# Altium PCB FC2.PcbDoc (part 2 of 2)
Units mm, origin at the board's own origin, x right, y up, seen from the top; angles counter-clockwise.
Board outline 53 x 51 mm, 4 copper layers (Top Layer, GND, PWR, Bottom Layer), stack 0.603 mm thick; 103 components, 69 nets, 505 pads, 103 vias.
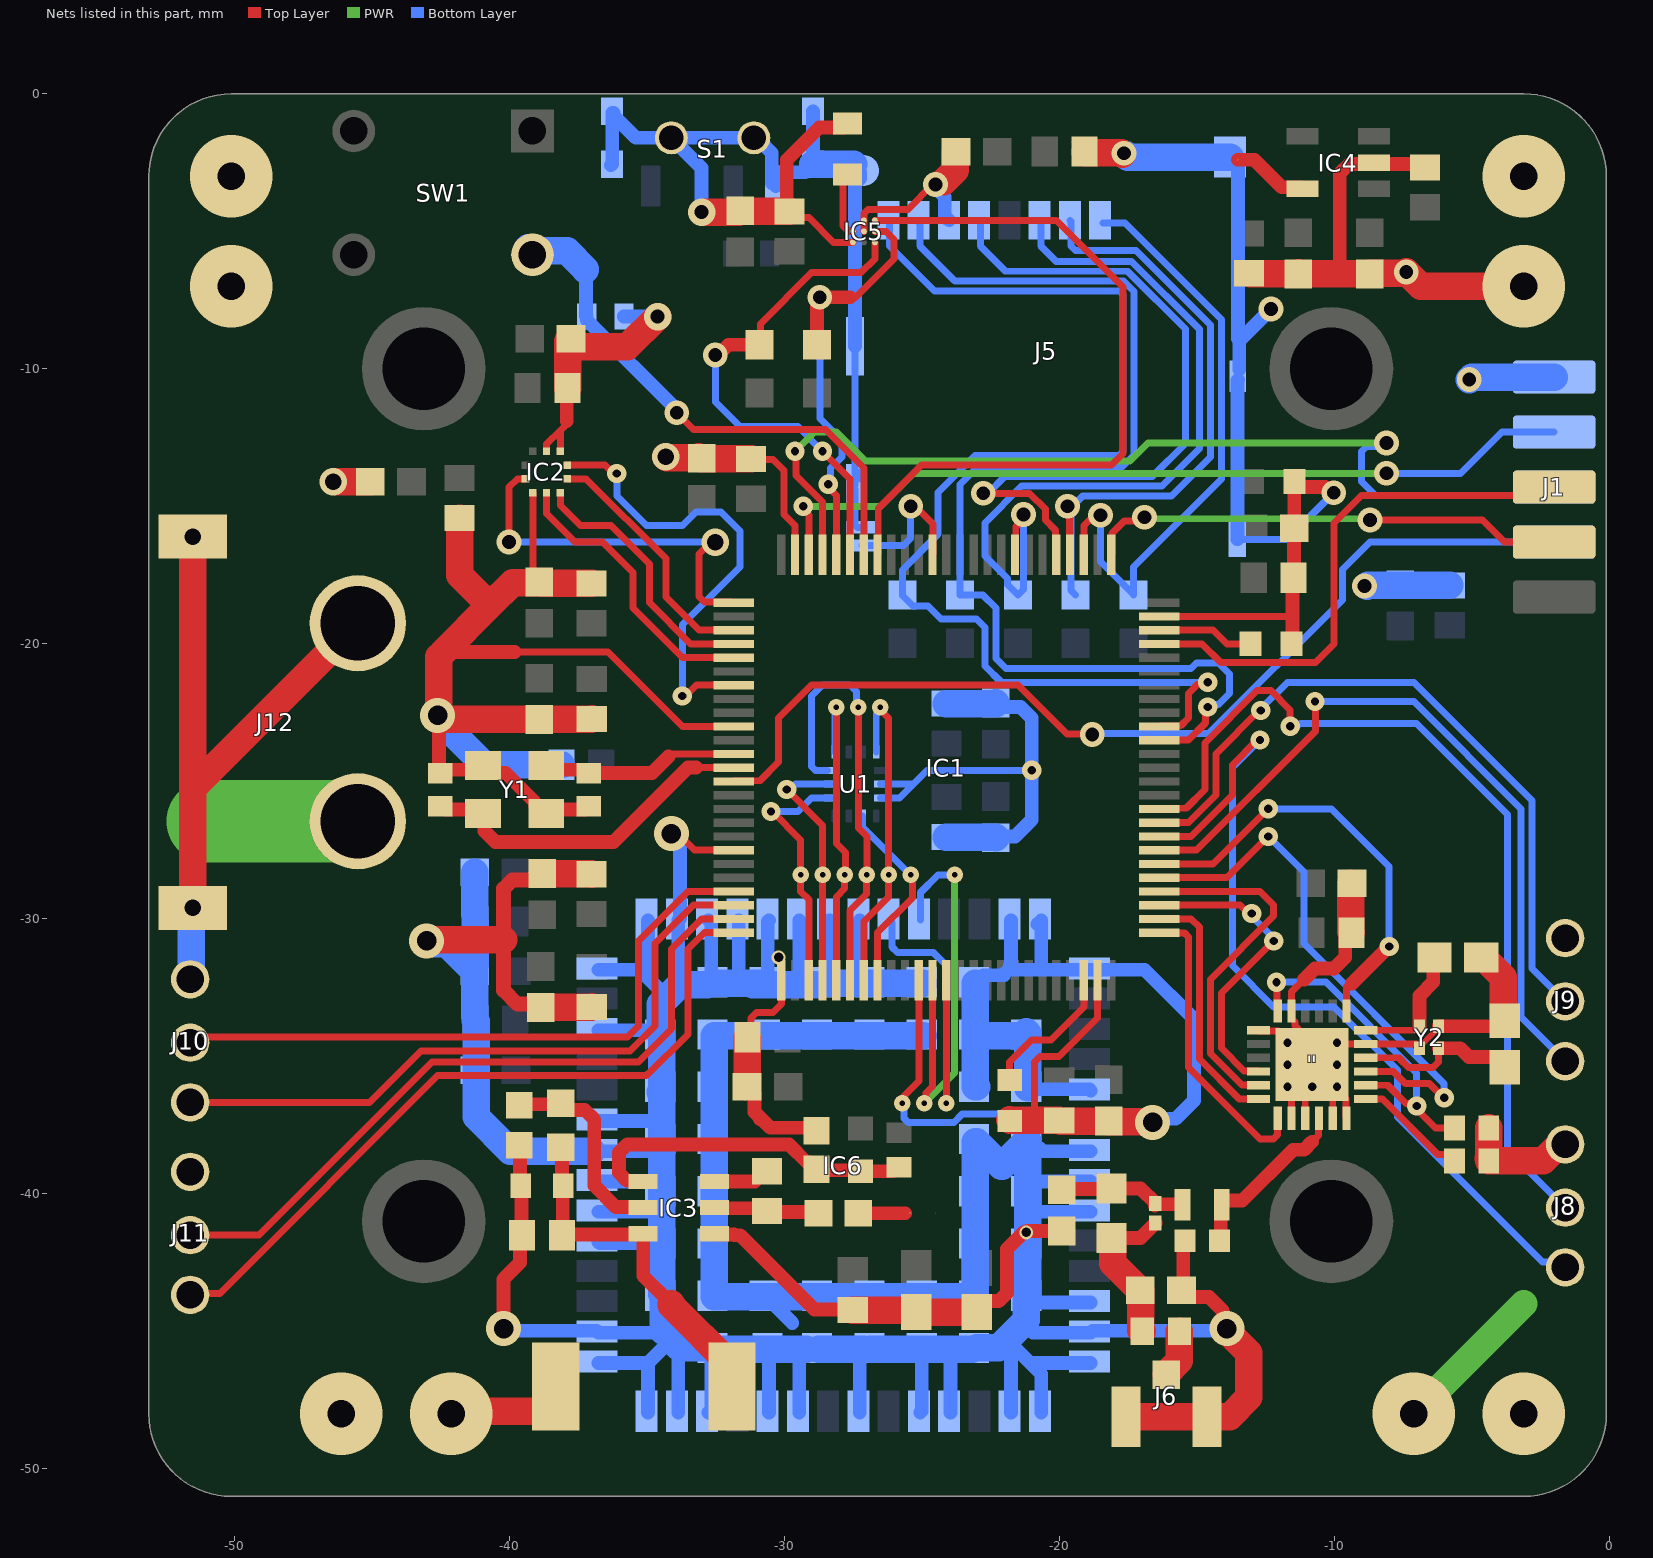
[diagram p4: the nets of this part, all layers, seen from the top]

## Via types
v1: diameter 0.7, hole 0.3, Top Layer to Bottom Layer, 34 vias
v2: diameter 0.9, hole 0.5, Top Layer to Bottom Layer, 26 vias
v3: diameter 0.6, hole 0.2, Top Layer to Bottom Layer, 13 vias
v4: diameter 1.27, hole 0.711, Top Layer to Bottom Layer, 9 vias
v5: diameter 1, hole 0.6, Top Layer to Bottom Layer, 9 vias
v6: diameter 3, hole 1, Top Layer to Bottom Layer, 8 vias
v7: diameter 0.5, hole 0.35, Top Layer to Bottom Layer, 2 vias
v8: diameter 1, hole 0.5, Top Layer to Bottom Layer, 2 vias

## Nets (pads, with @x,y where several pads share a name; then routed paths per layer and width w, separated by ;. In a path a pad name is that pad's centre, name@x,y a point inside that pad or via, vN(x,y) a via of type N, cw(c..) or ccw(c..) an arc to the next point about the centre after c; other vN are vias at no path point) (continued)
BAT+: D1.2 J12.1 | length 16.5
  Top Layer w1: v6@-42.483,-47.317 v6@-42.2,-47.6 ; v6@-41.9,-47.9 -38.305,-47.9 D1.2@-38.305,-47 ; v6@-7.641,-48 v6(-7.1,-48)
  PWR w1: v6(-7.1,-48) -3.1,-44
  PWR w3: -50.95,-26.45 J12.1@-45.5,-26.45
  other v6: -42.1,-48 -50.1,-7 -3.1,-3
BAT-: "\".5" "\".11" "\".13" "\".20" "\".21" "\".23" "\".24" "\".25" C1.2 C2.2 C3.1 C4.1 C5.1 C6.1 C7.1 C8.1 C9.1 C10.1 C11.1 C12.1 C13.1 C14.1 C15.1 C16.1 C17.1 C18.1 C19.2 C21.2 C22.1 C23.1 C24.2 C25.1 C26.1 C27.1 C28.1 C29.1 C30.1 C31.1 C32.1 C34.2 C35.2 C36.1 C37.2 C38.1 C40.1 C41.2 C42.1 C43.2 C44.2 C45.1 C46.1 C47.1 C48.1 C49.1 C50.1 C51.1 C52.1 C53.1 C54.1 C57.1 C58.1 C59.2 C60.1 C61.1 C62.1 C63.1 C64.1 C65.1 IC1.10 IC1.19 IC1.26 IC1.49 IC1.74 IC1.99 IC2.3 IC2.8 IC2.9 IC3.4 IC4.2 IC5.B1 IC5.B2 IC5.C3 IC6.1 IC6.2 IC6.3 IC6.4 IC6.5 IC6.6 IC6.7 IC6.8 IC6.13 IC6.14 IC6.15 IC6.19 IC6.21 IC6.22 IC6.23 IC6.26 IC6.27 IC6.28 IC6.29 IC6.30 IC6.32 IC6.33 IC6.35 IC6.37 IC6.38 IC6.40 IC6.41 IC6.42 IC6.43 IC6.44 IC6.47 IC6.48 IC6.49 IC6.50 IC6.51 IC6.54 IC6.56 IC6.57 IC6.58 IC6.59 IC6.60 IC6.61 IC6.62 IC6.63 IC6.64 IC6.65 IC6.66 IC6.67 IC6.68 IC6.69 IC6.70 IC6.71 IC6.72 IC6.73 IC6.74 IC6.75 IC6.76 IC6.77 IC6.78 IC6.79 IC6.80 IC6.81 IC6.82 IC6.83 IC6.84 IC6.85 IC6.86 IC6.87 IC6.88 IC6.89 IC6.90 IC6.91 IC6.92 IC6.93 IC6.94 IC6.95 IC6.96 IC6.97 IC6.98 IC6.99 IC6.100 J1.6 J5.6 J5.10 J5.11 J5.12 J5.13 J5.14 J5.15 J5.16 J6.2 J6.3 J8.3 J9.3 J10.3 J11.3 J12.2 J12.MNT R2.1 R5.1 R6.1 S1.3 S1.MH S1.MP U1.6 U1.7 Y1.2 Y1.4 Y2.2 Y2.4 | length 520.9
  Top Layer w0.2: v7(-30.2,-31.4) -30.15,-31.45 -30.15,-31.75 IC1.26@-30.1,-31.8 ; Y2.4@-6.9,-34.7 -6.9,-34.65 -6.3,-34.05 Y2.2@-6.3,-33.9
  Top Layer w0.254: -42.6,-20.4 -42.5,-20.3 -42.4,-20.3 -42.2,-20.3 ; -39.8,-20.3 -36.4,-20.3 -33.7,-23 IC1.10@-31.838,-23 ; IC2.3@-39.137,-14.512 -39.137,-17.538 C12.1@-38.9,-17.775 ; IC2.9@-38.637,-12.988 -38.635,-12.986 -38.635,-12.735 -38.137,-12.237 ; IC2.8@-38.137,-12.988 -38.137,-12.237 ; -37.9,-11.9 -37.9,-12 -38.137,-12.237 ; v4@-34,-26.9 -33.864,-26.9 -33.263,-27.5 IC1.19@-31.838,-27.5 ; C8.1@-31.338,-34.312 C8.1@-31.326,-34.3 -31.2,-34.175 -31.2,-33.6 -31,-33.4 -30.4,-33.4 -30.1,-33.1 IC1.26@-30.1,-32.238 ; C3.1@-31.2,-13.3 -30.4,-13.3 -30,-13.7 -30,-15.3 -29.6,-15.7 IC1.99@-29.6,-16.762 ; C45.1@-29.6,-4.5 -29.1,-4.5 -28.2,-5.4 IC5.C3@-27.5,-5.4 ; IC5.B2@-27.1,-5 IC5.B1@-27.1,-4.6 -27.1,-4.349 -26.951,-4.2 -25.5,-4.2 v2@-24.6,-3.3 ; -20.9,-37.3 -20.9,-35.2 -20.7,-35 -20,-35 -18.6,-33.6 IC1.49@-18.6,-32.238 ; C53.1@-19.423,-1.752 C53.1@-19.075,-2.1 ; IC1.74@-16.362,-19 -11.7,-19 -11.6,-19.1 ; -12.75,-34.05 -12.727,-34.073 -12.027,-34.073 -11.9,-34.2 ; -11.55,-37.25 -11.55,-36.15 v1@-11.5,-36.1 ; -11.5,-34.8 -11.2,-34.5 -10.8,-34.5 ; -11.1,-32.2 -11.55,-32.65 -11.55,-33.35 -11.527,-33.373 -11.527,-33.648 -11.429,-33.746 -11.429,-33.87 -11.309,-33.99 -11.309,-34.102 -10.911,-34.5 -10.8,-34.5 ; -11.05,-37.25 v1@-11.05,-36.1 ; v1(-10.8,-36.1) -10.8,-35.3 ; -10.05,-37.25 v1@-10.05,-36.05 ; v1@-10.05,-35.95 -10.05,-35.65 ; v1@-9.9,-35.175 -10.675,-35.175 -10.8,-35.3 ; v1(-9.9,-34.5) -10.8,-34.5 ; v1@-9.8,-36.3 -9.573,-36.527 -9.573,-37.227 -9.55,-37.25 ; v1@-9.602,-34.55 -8.85,-34.55 -7,-34.55 Y2.4@-6.9,-34.65 ; C65.1@-4.375,-37.6 -4.375,-37.575 C65.1@-4.3,-37.5 ; -10.8,-35.3 -10.8,-34.5
  Top Layer w0.5: v5(-46.4,-14.1) v5@-46.2,-14.1 ; v4@-42.5,-22.6 -42.55,-22.65 -42.55,-24.65 C2.2@-42.5,-24.7 -42.375,-24.575 -41.175,-24.575 Y1.2@-41.1,-24.5 ; -42.2,-20.3 -39.8,-20.3 ; Y1.2@-40.7,-24.549 -40.549,-24.7 -40.124,-24.7 -39.049,-25.775 -39.049,-25.9 -38.774,-26.175 Y1.4@-38.649,-26.175 ; v4(-40.2,-44.9) -40.2,-43.1 -39.6,-42.5 -39.6,-41.6 C38.1@-39.5,-41.5 ; R5.1@-39.625,-38.227 -39.6,-38.252 -39.6,-39.675 C37.2@-39.575,-39.7 -39.55,-39.725 -39.55,-41.475 C38.1@-39.525,-41.5 ; Y1.4@-38.625,-26.025 -37.225,-26.025 C1.2@-37.1,-25.9 ; -37.9,-11.9 -37.9,-10.725 C25.1@-37.875,-10.7 ; IC3.4@-32.525,-41.45 -32.5,-41.475 -31.825,-41.475 -31.8,-41.5 -31.6,-41.5 -28.9,-44.2 C36.1@-27.5,-44.2 ; C16.1@-31.099,-36.35 -31.075,-36.35 -31.075,-37.021 -30.875,-37.221 -30.875,-37.275 -30.821,-37.275 -30.497,-37.598 -29.054,-37.598 -29.054,-37.45 -28.825,-37.679 R6.1@-28.825,-37.699 ; C45.1@-29.9,-4.2 -29.9,-2.4 ; -29.85,-2.35 -28.725,-1.225 -27.85,-1.225 C44.2@-27.7,-1.075 ; C34.2@-23.1,-44.3 C34.2@-23,-44.3 -23,-44.201 -22.697,-43.897 -22.193,-43.897 -21.9,-43.605 -21.9,-42 v7@-21.3,-41.4 ; v7@-21.15,-41.35 C58.1@-19.9,-41.35 ; C59.2@-15.427,-41.7 -15.488,-41.762 -15.488,-43.438 C57.1@-15.55,-43.5 -15.3,-43.75 -14.55,-43.75 -14.047,-44.253 v4@-14.047,-44.553 ; C21.2@-11.6,-20 -11.512,-19.912 -11.512,-17.638 C10.1@-11.474,-17.6 ; C10.1@-11.462,-17.438 -11.462,-15.812 C18.1@-11.45,-15.8 C19.2@-11.45,-14.15 ; C19.2@-11.45,-14.1 C19.2@-11.45,-14.15 ; -11.1,-32.2 -10.7,-31.8 -10,-31.8 -9.6,-31.4 -9.6,-30.725 C61.1@-9.375,-30.5 ; v2(-10.014,-14.504) -10.122,-14.504 -10.326,-14.3 -11.3,-14.3 C19.2@-11.45,-14.15 ; -10,-6.55 -9.8,-6.35 -9.8,-2.9 -9.45,-2.55 -8.6,-2.55 IC4.2@-8.55,-2.5 -8.5,-2.55 -6.825,-2.55 C41.2@-6.7,-2.675 ; Y2.2@-6.2,-33.9 C64.1@-4,-33.9 ; v6@-3.15,-6.95 v6(-3.1,-7)
  Top Layer w0.54: C14.1@-38.85,-33.225 -38.976,-33.1 -39.7,-33.1 -40.2,-32.6 -40.2,-30.75 -40.2,-28.9 -39.884,-28.584 -39.03,-28.584 -38.8,-28.354 C15.1@-38.8,-28.35
  Top Layer w1: J10.3@-51.6,-32.2 J10.3@-51.55,-32.15 ; J12.MNT@-51.6,-16.2 -51.5,-16.3 -51.5,-25.25 ; J12.MNT@-51.5,-29.6 -51.5,-25.25 ; v5@-46.2,-14.1 C28.1@-45.05,-14.1 ; J12.2@-45.5,-19.25 -51.5,-25.25 ; v4(-43,-30.8) -42.95,-30.75 -40.2,-30.75 ; v4(-42.6,-22.6) -42.565,-22.565 -42.565,-20.465 ; -42.4,-20.3 -40.7,-18.6 ; v4@-42.377,-22.75 C13.1@-38.9,-22.75 ; C27.1@-41.8,-15.425 -41.8,-17.5 -40.7,-18.6 ; C13.1@-38.9,-22.738 -37.012,-22.738 C5.1@-37,-22.725 ; C14.1@-38.85,-33.225 -38.85,-33.213 -37.012,-33.213 C6.1@-37,-33.2 ; C15.1@-38.8,-28.354 -38.8,-28.362 -37.013,-28.362 C7.1@-37,-28.375 ; C15.1@-38.8,-28.35 C15.1@-38.8,-28.337 ; C25.1@-37.875,-10.7 -37.875,-9 -37.775,-8.9 -37.725,-8.9 -37.425,-9.2 -35.7,-9.2 v8(-34.6,-8.1) ; C4.1@-37,-17.8 -38.875,-17.8 -38.9,-17.775 -39.875,-17.775 -40.7,-18.6 ; v5(-34.3,-13.2) -34.275,-13.225 C11.1@-33.1,-13.225 ; C11.1@-33.1,-13.2 -33.025,-13.275 C3.1@-31.2,-13.275 ; v8@-32.9,-4.3 -31.65,-4.3 -31.625,-4.275 C46.1@-31.6,-4.275 ; C46.1@-31.475,-4.275 C45.1@-29.8,-4.275 ; C16.1@-31.35,-36.1 -31.338,-36.1 C8.1@-31.338,-34.312 ; C36.1@-27.5,-44.225 C35.2@-25.475,-44.225 ; C35.2@-25.2,-44.3 C34.2@-23.1,-44.3 ; v2@-24.2,-3.2 -23.775,-2.775 -23.775,-2.1 C54.1@-23.75,-2.1 ; C24.2@-21.8,-37.3 -21.774,-37.326 C9.1@-20,-37.326 ; C9.1@-19.95,-37.35 C17.1@-18.2,-37.35 -18.2,-37.375 -16.725,-37.375 v4@-16.6,-37.5 ; C53.1@-19.075,-2.1 -19.075,-2.125 -19.05,-2.15 -17.75,-2.15 v2@-17.7,-2.2 ; J6.2@-17.575,-48.1 J6.3@-14.625,-48.1 -13.8,-48.1 -13.1,-47.4 -13.1,-45.773 -13.9,-44.973 v4(-13.9,-44.9) ; C43.2@-13.05,-6.538 C42.1@-11.3,-6.538 ; C42.1@-11.3,-6.5 -11.25,-6.55 -10,-6.55 C40.1@-8.7,-6.55 -8.7,-6.525 v2@-7.525,-6.525 ; C62.1@-9.4,-28.7 -9.4,-30.475 C61.1@-9.375,-30.5 ; v2(-7.375,-6.475) -6.849,-7 v6@-3.2,-7 ; C63.1@-4.7,-31.4 C63.1@-4.65,-31.4 -4.575,-31.4 -3.85,-32.125 -3.85,-33.65 C64.1@-3.8,-33.7 ; C60.1@-4.4,-38.7 -4.375,-38.675 C65.1@-4.375,-37.6 ; C60.1@-4.375,-38.8 -2.4,-38.8 -1.9,-38.3 -1.808,-38.3 -1.785,-38.277 -1.723,-38.277 J8.3@-1.7,-38.3
  Top Layer w2: v6@-46.291,-47.809 v6(-46.1,-48)
  Bottom Layer w0.254: J5.13@-27.45,-14.25 -27.425,-14.225 J5.12@-27.425,-9.18 ; J5.13@-27.425,-14.375 -27.425,-15.667 -27.327,-15.765 J5.10@-27.2,-15.765 ; J5.13@-27.228,-13.999 J5.13@-27.228,-13.753 ; U1.7@-26.487,-25.6 -25.8,-25.6 -25.3,-25.1 ; U1.6@-26.487,-25.1 -25.3,-25.1 ; v1(-21,-24.6) -24.8,-24.6 -25.3,-25.1 ; J5.14@-13.515,-16.2 -11.71,-16.2 v2(-10.014,-14.504)
  Bottom Layer w0.5: v4@-40.2,-44.8 -40.026,-44.974 -36.824,-44.974 -36.75,-45.049 -34.451,-45.049 -34.4,-45.1 ; IC6.50@-37,-38.449 -36.75,-38.449 -34.549,-38.449 IC6.78@-34.5,-38.4 ; IC6.43@-36.75,-46.149 -34.949,-46.149 -34.15,-45.35 ; IC6.47@-36.75,-41.749 -36.7,-41.799 IC6.76@-34.5,-41.8 ; IC6.48@-36.75,-40.649 -34.549,-40.649 ; IC6.49@-36.75,-39.549 IC6.77@-34.85,-39.549 ; IC6.51@-36.75,-37.349 -34.549,-37.349 -34.5,-37.3 ; IC6.54@-36.75,-34.049 IC6.80@-34.75,-34.049 ; IC6.56@-36.75,-31.849 -35.251,-31.849 -34.95,-32.15 ; S1.MP@-36.3,-2.6 -36.25,-2.55 S1.MP@-36.25,-0.7 ; S1.MP@-36.2,-0.7 -36.2,-0.785 -35.385,-1.6 S1.MH@-34.1,-1.6 ; R2.1@-35.825,-8.1 v8(-34.6,-8.1) ; IC6.42@-34.95,-47.949 -34.95,-46.15 ; IC6.1@-34.95,-30.049 -34.95,-32.15 ; -34.3,-32.8 -34.95,-32.15 ; v4(-34.1,-26.9) -34.1,-27.108 -33.785,-27.423 -33.785,-29.984 -33.85,-30.049 -33.85,-32.35 ; IC6.41@-33.85,-47.949 -33.85,-45.55 ; v8@-33,-4.1 -33,-2.7 S1.MH@-34.1,-1.6 ; IC6.40@-32.75,-47.949 -32.65,-47.849 IC6.74@-32.65,-45.949 ; IC6.3@-32.75,-30.049 -32.65,-30.149 IC6.57@-32.65,-32.15 ; -31.65,-32.25 IC6.4@-31.65,-30.049 ; S1.MH@-31.2,-1.6 S1.MH@-34.1,-1.6 ; S1.MH@-31.1,-1.7 -30.9,-1.7 -30.45,-2.15 S1.3@-30.45,-3.25 ; IC6.58@-30.6,-32.2 -30.6,-30.099 IC6.5@-30.55,-30.049 ; IC6.38@-30.55,-47.949 IC6.73@-30.55,-45.75 ; IC6.95@-30.5,-43.898 -29.7,-44.698 -29.7,-44.7 ; S1.3@-30.3,-3.35 -30.3,-2.9 -30.25,-2.85 S1.MP@-29.235,-2.85 ; IC6.37@-29.45,-47.949 -29.45,-46.05 IC6.72@-29.2,-45.8 ; -29.45,-32.25 IC6.6@-29.45,-30.049 ; S1.MP@-28.95,-2.55 S1.MP@-28.95,-0.635 ; IC6.59@-28.5,-32.099 -28.35,-31.949 IC6.7@-28.35,-30.049 ; J5.12@-27.425,-9.18 -27.425,-3.27 -27.239,-3.084 -27.239,-2.861 J5.11@-27.3,-2.8 ; IC6.35@-27.25,-47.949 -27.25,-46.049 IC6.71@-27.1,-45.899 ; IC6.8@-27.25,-30.049 -27.25,-32.15 IC6.60@-27.2,-32.2 ; IC6.33@-25.05,-47.949 -25,-47.899 IC6.70@-25,-45.8 ; v2(-24.5,-3.3) -24.5,-3.408 -24.16,-3.748 -24.16,-4.44 J5.6@-24,-4.6 ; IC6.32@-23.95,-47.949 -23.95,-45.65 ; IC6.62@-23.05,-32.349 -22.75,-32.049 -22,-32.049 ; C31.1@-22.3,-27.05 -22.25,-27 -21.6,-27 -21,-26.4 v1(-21,-24.6) -21,-22.7 -21.4,-22.3 -22.15,-22.3 C30.1@-22.3,-22.15 ; -22,-32 -21.849,-31.849 ; -21.9,-45.3 -21.75,-45.45 ; -21.8,-31.7 -21.75,-31.65 IC6.13@-21.75,-30.049 ; IC6.30@-21.75,-47.949 -21.75,-45.45 ; -21.649,-31.849 IC6.15@-18.85,-31.849 ; -21.3,-44.7 -20.951,-45.049 -18.85,-45.049 -18.775,-44.974 -14.074,-44.974 v4@-14,-44.9 ; IC6.66@-21,-40.4 -20.751,-40.649 IC6.23@-18.85,-40.649 ; IC6.65@-21,-38.199 -20.85,-38.349 -20.7,-38.349 -20.6,-38.449 IC6.21@-18.85,-38.449 ; IC6.64@-21,-36.2 -20.999,-36.199 IC6.19@-18.9,-36.2 IC6.19@-18.85,-36.249 ; IC6.68@-20.85,-43.949 IC6.26@-18.85,-43.949 ; IC6.66@-20.849,-39.549 IC6.22@-18.85,-39.549 ; IC6.14@-20.8,-30.199 -20.65,-30.049 -20.65,-31.75 -20.6,-31.8 ; IC6.29@-20.65,-47.949 -20.65,-46.55 -21.051,-46.149 ; IC6.28@-18.85,-46.149 -21.051,-46.149 ; IC6.15@-18.849,-31.849 -16.893,-31.849 -15.1,-33.642 -15.1,-36.6 -15.771,-37.271 -16.471,-37.271 v4(-16.6,-37.4) ; J5.16@-13.78,-2.3 -13.5,-2.58 -13.5,-8.9 ; J5.14@-13.525,-16.2 -13.512,-16.187 -13.512,-10.412 J5.15@-13.5,-10.4 ; J5.15@-13.45,-10.025 -13.45,-8.975 ; -13.437,-8.962 v2(-12.3,-7.825) ; C23.1@-7.5,-17.9 -7.475,-17.875 -7.462,-17.862 -5.812,-17.862 C22.1@-5.8,-17.875 ; v2@-7.424,-6.475 -7.375,-6.425 v2(-7.375,-6.475) ; -21.75,-45.45 -21.051,-46.149
  Bottom Layer w1: J10.3@-51.6,-32.1 -51.55,-32.05 -51.55,-29.65 J12.MNT@-51.5,-29.6 ; J12.MNT@-51.5,-16.1 J12.MNT@-51.5,-16 ; J12.2@-45.5,-19.25 J12.2@-45.5,-19.2 ; v4@-42.9,-30.9 -42.274,-30.9 -41.275,-31.899 C51.1@-41.25,-31.899 C47.1@-41.25,-33.55 ; v4@-42.5,-22.8 -40.9,-24.4 C49.1@-38.1,-24.4 ; C48.1@-41.25,-29.85 C52.1@-41.25,-28.299 ; C47.1@-41.225,-33.699 -41.2,-33.724 -41.2,-37.2 -39.951,-38.449 IC6.50@-37,-38.449 ; C51.1@-41.225,-31.675 C48.1@-41.225,-30.099 ; IC6.79@-34.5,-36.3 -34.45,-36.35 IC6.78@-34.45,-38.049 ; IC6.80@-34.5,-34.2 -34.5,-33.1 ; IC6.75@-34.45,-43.65 IC6.76@-34.45,-41.9 ; IC6.76@-34.45,-41.849 IC6.77@-34.45,-40 ; IC6.77@-34.45,-39.949 IC6.78@-34.45,-38.4 ; IC6.79@-34.45,-36.149 IC6.80@-34.45,-34.249 ; -34.4,-45 IC6.75@-34.4,-43.799 ; -34.25,-32.85 -33.799,-32.399 IC6.57@-32.8,-32.399 ; -34.1,-45.3 -33.85,-45.55 ; -33.801,-45.599 IC6.74@-32.55,-45.599 ; IC6.74@-32.55,-45.649 IC6.73@-30.55,-45.649 ; IC6.96@-32.55,-43.749 -32.55,-41.849 -32.55,-39.949 -32.55,-38.049 -32.55,-36.149 IC6.81@-32.55,-34.35 ; IC6.81@-32.55,-34.249 -30.65,-34.249 -28.75,-34.249 -26.85,-34.249 IC6.85@-24.95,-34.249 ; IC6.57@-32.5,-32.349 IC6.58@-31.2,-32.349 ; IC6.96@-32.482,-43.749 IC6.95@-30.65,-43.749 ; IC6.58@-30.7,-32.349 IC6.58@-31.2,-32.349 ; IC6.73@-30.5,-45.649 IC6.72@-29.2,-45.649 ; IC6.95@-30.5,-43.749 -28.75,-43.749 -26.85,-43.749 IC6.92@-24.95,-43.749 ; S1.MP@-28.95,-2.565 J5.11@-27.465,-2.565 ; IC6.59@-28.8,-32.4 -31.149,-32.4 IC6.58@-31.2,-32.349 ; IC6.72@-28.75,-45.649 IC6.71@-27.1,-45.649 ; IC6.59@-28.5,-32.349 IC6.60@-27.2,-32.349 ; IC6.93@-26.9,-43.799 IC6.93@-26.8,-43.799 ; IC6.71@-26.85,-45.649 IC6.70@-24.95,-45.649 ; IC6.60@-26.85,-32.349 IC6.61@-24.95,-32.349 ; IC6.70@-24.9,-45.649 -23.949,-45.649 ; IC6.92@-24.776,-43.749 IC6.91@-23.05,-43.749 ; C32.1@-24.1,-27.025 -22.3,-27.025 C31.1@-22.3,-27.05 ; C29.1@-24.1,-22.175 -22.3,-22.175 C30.1@-22.3,-22.15 ; -23.9,-45.649 IC6.69@-23.151,-45.649 ; IC6.91@-23.05,-43.678 -23.05,-41.849 IC6.89@-23.05,-39.949 ; IC6.89@-23.05,-39.878 IC6.88@-23.05,-38.1 ; IC6.86@-23.05,-34.199 IC6.62@-23.05,-32.349 ; IC6.87@-23,-36.1 -23.048,-36.1 -23.05,-36.099 -23.05,-34.249 IC6.63@-21.15,-34.249 ; IC6.69@-23,-45.599 -22.199,-45.599 -21.9,-45.3 -21.3,-44.7 ; IC6.88@-23,-38.099 -22.098,-39 -22.075,-39 -22.04,-38.965 -22.04,-38.939 -21.15,-38.049 IC6.66@-21.15,-39.899 ; -21.2,-44.6 IC6.68@-21.2,-43.8 ; IC6.63@-21.2,-34.1 -21.15,-34.15 IC6.63@-21.15,-34.249 ; IC6.68@-21.15,-43.749 -21.15,-41.849 IC6.66@-21.15,-39.949 ; IC6.64@-21.15,-36.149 IC6.63@-21.15,-34.249 ; v2@-17.6,-2.2 -17.5,-2.3 J5.16@-13.78,-2.3 ; v2@-8.8,-17.9 -8.775,-17.875 -7.475,-17.875 C22.1@-5.8,-17.875 ; v2(-5.09,-10.391) -4.999,-10.3 J1.6@-2,-10.3
  other v1: -11.7,-36.1 -9.9,-36.1 -11.7,-35.3 -9.9,-35.3 -11.7,-34.5
  other v2: -8.9,-17.9 -17.642,-2.16
  other v6: -3.1,-48 -50.1,-3
  other v7: -21.2,-41.4
  other v8: -33,-4.3
"BMM350 INT": IC1.93 IC5.A1 | length 27.5
  Top Layer w0.254: IC5.A1@-26.7,-4.6 -20.1,-4.6 -17.671,-7.029 -17.671,-13.071 -18.1,-13.5 -25,-13.5 -26.577,-15.077 -26.577,-16.739 IC1.93@-26.6,-16.762
"BMM350 SCK": IC1.95 IC5.A3 R8.1 | length 18.8
  Top Layer w0.254: R8.1@-30.9,-9.123 -30.862,-9.085 -30.862,-8.362 -29,-6.5 -27.2,-6.5 -26.7,-6 IC5.A3@-26.7,-5.4 ; v1(-28.6,-13) -27.6,-14 IC1.95@-27.6,-16.762
  Top Layer w0.5: v2(-32.5,-9.5) -32.399,-9.5 -32.022,-9.123 R8.1@-30.9,-9.123
  Bottom Layer w0.254: v2(-32.5,-9.5) -32.5,-11.2 -31.6,-12.1 -29.5,-12.1 v1(-28.6,-13)
"BMM350 SDA": IC1.96 IC5.A2 R7.1 | length 16.7
  Top Layer w0.254: R7.1@-28.8,-9.123 R7.1@-28.421,-8.744 ; v1(-28.396,-14.196) -28.396,-14.317 -28.1,-14.612 IC1.96@-28.1,-16.762 ; -27.6,-7.4 -27.4,-7.4 -26,-6 -26,-5.3 -26.3,-5 IC5.A2@-26.7,-5
  Top Layer w0.5: R7.1@-28.8,-9.123 -28.8,-7.608 v2@-28.7,-7.508 ; v2@-28.4,-7.4 -27.6,-7.4
  Bottom Layer w0.254: v2(-28.7,-7.4) -28.7,-11.8 -27.9,-12.6 -27.9,-13.2 -28.31,-13.61 -28.31,-14.11 v1(-28.396,-14.196)
BOOT: IC1.94 R2.2 SW1.3 | length 19.8
  Top Layer w0.254: v2(-33.9,-11.6) -33.3,-12.2 -28.5,-12.2 -27.1,-13.6 IC1.94@-27.1,-16.762
  Bottom Layer w0.5: -37.225,-6.4 -37.2,-6.425 -37.2,-8.075 R2.2@-37.175,-8.1 -37.175,-8.225 -33.9,-11.5 v2(-33.9,-11.6)
  Bottom Layer w1: SW1.3@-39.3,-5.6 -39.195,-5.705 -37.895,-5.705 -37.225,-6.375 -37.225,-6.4
"CS BMI": IC1.28 U1.12 | length 9
  Top Layer w0.254: v1(-30.475,-26.1) -30.427,-26.1 -29.4,-27.127 v3@-29.4,-28.422 ; v3(-29.4,-28.4) -29.4,-29 -29.1,-29.3 IC1.28@-29.1,-32.1
  Bottom Layer w0.254: v1(-30.475,-26.1) -29.5,-26.1 -29,-25.6 U1.12@-28.313,-25.6
"CS BMP": IC1.3 IC2.6 | length 9.1
  Top Layer w0.254: IC2.6@-37.874,-14 -37.2,-14 -34.3,-16.9 -34.3,-18.3 -33.1,-19.5 IC1.3@-31.838,-19.5
"CS SX1280": "\".19" IC1.51 | length 10.8
  Top Layer w0.254: IC1.51@-16.3,-30.5 -16.295,-30.505 -15.449,-30.505 -15.3,-30.654 -15.3,-35.4 -12.7,-38 -12.203,-38 -12.055,-37.851 -12.055,-37.255 -12.05,-37.25
"DAN-F10N RX": IC1.38 IC6.9 | length 12.7
  Top Layer w0.254: v3@-24.1,-36.7 IC1.38@-24.1,-32.238
  Bottom Layer w0.254: IC6.9@-26.1,-30.1 -26.069,-30.131 -26.069,-31.031 -25.877,-31.223 -24.577,-31.223 -24.1,-31.7 v3(-24.1,-36.7)
"DAN-F10N TX": IC1.37 IC6.10 | length 15.9
  Top Layer w0.254: v3(-24.9,-36.7) -24.834,-36.634 -24.834,-36.334 -24.6,-36.1 IC1.37@-24.6,-32.238
  PWR w0.254: v3(-24.9,-36.7) -23.8,-35.6 v3(-23.8,-28.4)
  Bottom Layer w0.254: IC6.10@-25.05,-30.049 -25.05,-29.05 -24.4,-28.4 v3(-23.8,-28.4)
"Dshot M1": IC1.22 J10.2 | length 23.6
  Top Layer w0.254: J10.2@-51.4,-34.3 -35.7,-34.3 -35.3,-33.9 -35.3,-30.8 -33.5,-29 IC1.22@-31.838,-29
"Dshot M2": IC1.24 J11.2 | length 26.2
  Top Layer w0.254: J11.2@-51.5,-41.6 -51.4,-41.5 -49.1,-41.5 -42.8,-35.2 -35.3,-35.2 -34.1,-34 -34.1,-31.1 -33,-30 IC1.24@-31.838,-30
"Dshot M3": IC1.60 J8.2 | length 32.9
  Top Layer w0.254: IC1.60@-16.362,-26 -16.339,-25.977 -15.377,-25.977 -14.7,-25.3 -14.7,-23.6 -12.8,-21.7 -12.3,-21.7 -11.6,-22.4 v1(-11.6,-23)
  Bottom Layer w0.254: v1(-11.6,-23) -11.515,-22.915 -11.243,-22.915 -11.228,-22.9 -7,-22.9 -3.7,-26.2 -3.7,-38.4 J8.2@-1.6,-40.5
"Dshot M4": IC1.59 J9.2 | length 26.2
  Top Layer w0.254: IC1.59@-16.362,-26.5 -15.3,-26.5 -14.3,-25.5 -14.3,-24 -12.727,-22.427 v1(-12.673,-22.427)
  Bottom Layer w0.254: v1(-12.673,-22.427) -12.673,-22.373 -11.7,-21.4 -7.1,-21.4 -2.8,-25.7 -2.8,-31.8 J9.2@-1.6,-33
EN: IC3.2 R4.1 R5.2 | length 7.5
  Top Layer w0.5: R5.2@-39.625,-36.773 -39.588,-36.736 -38.162,-36.736 R4.1@-38.125,-36.7 -37.875,-36.95 -37.25,-36.95 -36.9,-37.3 -36.9,-39.7 -36.125,-40.475 -35.15,-40.475 IC3.2@-35.125,-40.5
FB: C39.1 IC3.1 R3.1 R6.2 | length 12.2
  Top Layer w0.5: IC3.1@-35.125,-39.55 -35.15,-39.525 -35.707,-39.525 -36,-39.232 -36,-38.493 -35.707,-38.2 -29.827,-38.2 -29.179,-38.848 R6.2@-29.054,-38.848 ; R6.2@-28.825,-39.101 -28.787,-39.139 -27.263,-39.139 R3.1@-27.225,-39.177 -26.052,-39.177 -25.9,-39.025 C39.1@-25.825,-39.025
"GPS Time": IC1.36 IC6.20 | length 12.3
  Top Layer w0.254: v3(-25.7,-36.7) -25.634,-36.634 -25.634,-36.434 -25.1,-35.9 IC1.36@-25.1,-32.238
  Bottom Layer w0.254: v3(-25.7,-36.7) -25.634,-36.766 -25.634,-37.251 -25.485,-37.4 -23.824,-37.4 -23.524,-37.1 -19.1,-37.1 IC6.20@-18.9,-37.3
"INT1 BMI": IC1.32 U1.4 | length 12.1
  Top Layer w0.254: IC1.32@-27.1,-32.2 -27.1,-30.1 -26.208,-29.208 -26.208,-28.408 v3(-26.2,-28.4) -26.2,-22.694 -26.5,-22.394 v3(-26.5,-22.3)
  Bottom Layer w0.254: U1.4@-26.65,-23.937 -26.65,-22.544 -26.5,-22.394 v3(-26.5,-22.3)
"INT2 BMI": IC1.33 U1.9 | length 7.3
  Top Layer w0.254: IC1.33@-26.6,-32.238 -26.6,-30.5 -25.334,-29.234 -25.334,-28.466 v3(-25.4,-28.4)
  Bottom Layer w0.254: U1.9@-27.15,-26.263 -27.148,-26.265 -27.148,-26.652 v3(-25.4,-28.4)
"INT BMP": IC1.7 IC2.7 | length 17.1
  Top Layer w0.254: IC2.7@-37.9,-13.5 IC2.7@-37.884,-13.5 -36.51,-13.5 -36.204,-13.805 v1(-36.084,-13.805) ; v1(-33.7,-21.9) -33.579,-21.9 -33.179,-21.5 IC1.7@-31.838,-21.5
  Bottom Layer w0.254: v1@-36.1,-13.8 -36.084,-13.816 -36.084,-14.616 -35,-15.7 -33.7,-15.7 -33.2,-15.2 -32.3,-15.2 -31.6,-15.9 -31.6,-17.2 -33.7,-19.3 v1(-33.7,-21.9)
"MISO BMI": IC1.30 U1.1 | length 11.8
  Top Layer w0.254: IC1.30@-28.1,-32.2 -28.1,-29.2 -27.8,-28.9 v3(-27.8,-28.4) -27.762,-28.362 -27.762,-27.592 -28.1,-27.254 v3(-28.1,-22.3)
  Bottom Layer w0.254: U1.1@-28.15,-23.937 -28.15,-22.35 v3(-28.1,-22.3)
"MISO BMP": IC1.4 IC2.5 | length 9.7
  Top Layer w0.254: IC2.5@-38.137,-14.512 -38.137,-14.963 -37.4,-15.7 -36.3,-15.7 -34.9,-17.1 -34.9,-18.5 -33.4,-20 IC1.4@-31.838,-20
"MISO SX1280": "\".16" IC1.53 | length 11.2
  Top Layer w0.254: IC1.53@-16.362,-29.5 -13.421,-29.5 -13.121,-29.8 v1(-13,-29.8) ; -12.75,-35.55 -12.773,-35.527 -13.273,-35.527 -14.1,-34.7 -14.1,-32.7 v1(-12.2,-30.8)
  Bottom Layer w0.254: v1(-13,-29.8) -13,-29.9 -12.2,-30.7 v1(-12.2,-30.8)
"MOSI BMI": IC1.31 U1.14 | length 16
  Top Layer w0.254: IC1.31@-27.6,-32.2 -27.6,-29.7 -27,-29.1 v3(-27,-28.4) ; v3(-27.3,-22.3) -27.3,-26.7 -26.99,-27.01 v3@-26.99,-28.4
  Bottom Layer w0.254: U1.14@-28.423,-24.602 -28.851,-24.602 -29,-24.453 -29,-21.9 -28.6,-21.5 -27.6,-21.5 -27.366,-21.734 -27.366,-22.234 v3(-27.3,-22.3)
"MOSI BMP": IC1.5 IC2.4 | length 10.5
  Top Layer w0.254: IC2.4@-38.637,-14.512 -38.637,-15.263 -37.6,-16.3 -36.6,-16.3 -35.5,-17.4 -35.5,-18.7 -33.7,-20.5 IC1.5@-31.838,-20.5
"MOSI SX1280": "\".17" IC1.54 | length 13
  Top Layer w0.254: IC1.54@-16.4,-29 -12.7,-29 -12.2,-29.5 -12.2,-29.9 -14.5,-32.2 -14.5,-34.9 -13.353,-36.047 -12.753,-36.047 -12.75,-36.05
NetC21_1: C21.1 IC1.73 | length 3.5
  Top Layer w0.254: IC1.73@-16.3,-19.5 -14.4,-19.5 -13.9,-20 C21.1@-13.05,-20
NetC24_1: C24.1 IC1.48 | length 5.2
  Top Layer w0.254: C24.1@-21.8,-35.85 -21.8,-35.2 -21,-34.4 -20.3,-34.4 -19.1,-33.2 IC1.48@-19.1,-32.2
NetC33_1: C33.1 IC3.5 L1.1 | length 3.9
  Top Layer w0.5: IC3.5@-32.525,-40.5 -32.5,-40.525 -30.725,-40.525 C33.1@-30.625,-40.625 -30.588,-40.662 -28.789,-40.662 L1.1@-28.751,-40.7
NetC33_2: C33.2 IC3.6 | length 2.1
  Top Layer w0.5: IC3.6@-32.525,-39.55 -31.075,-39.55 -30.7,-39.175 C33.2@-30.625,-39.175
NetC44_1: C44.1 IC5.C2 | length 2.4
  Top Layer w0.254: C44.1@-27.6,-2.9 -27.856,-3.156 -27.856,-4.796 -27.651,-5 IC5.C2@-27.5,-5
NetC55_1: C55.1 C56.2 C57.2 L2.1 | length 5.7
  Top Layer w0.5: C55.1@-18.1,-41.6 -17.037,-41.6 -16.5,-41.063 L2.1@-16.5,-41.054
  Top Layer w1: C55.1@-18.1,-41.6 -18.05,-41.65 -18.05,-42.525 -17.075,-43.5 C57.2@-17.05,-43.5 -17.025,-43.5 -17.025,-44.95 C56.2@-16.975,-45
NetC55_2: C55.2 C58.2 L2.2 L3.1 | length 4.8
  Top Layer w0.5: C58.2@-19.9,-39.85 -19.875,-39.825 -18.125,-39.825 C55.2@-18.1,-39.8 -17.037,-39.8 -16.5,-40.337 L2.2@-16.5,-40.346 ; L2.2@-16.519,-40.426 -16.519,-40.365 L2.2@-16.5,-40.346 ; L3.1@-15.515,-40.4 -15.542,-40.373 -16.481,-40.373 -16.5,-40.354 L2.2@-16.5,-40.346
NetC56_1: C56.1 J6.1 | length 1.8
  Top Layer w1: J6.1@-16.1,-46.575 -16.1,-46.55 -15.625,-46.075 C56.1@-15.625,-45
NetC59_1: "\".22" C59.1 L3.2 | length 6.5
  Top Layer w0.254: -10.8,-38.1 -10.573,-37.873 -10.573,-37.273 -10.55,-37.25
  Top Layer w0.5: C59.1@-14.173,-41.7 -14.12,-41.647 L3.2@-14.12,-40.42 ; L3.2@-14.1,-40.2 -14.1,-40.221 -14.078,-40.243 -13.343,-40.243 -11.498,-38.398 -11.098,-38.398 -10.8,-38.1
NetC60_2: "\".1" C60.2 | length 4.1
  Top Layer w0.254: -8.8,-36.527 -8.774,-36.553 -8.247,-36.553 -6.232,-38.568 -5.857,-38.568 C60.2@-5.625,-38.8
NetIC4_5: IC4.5 J14.1 | length 2.8
  Top Layer w0.5: J14.1@-13.5,-2.4 -12.9,-2.4 -11.9,-3.4 -11.2,-3.4 IC4.5@-11.15,-3.45
NetJ13_1: J13.1 L1.2 | length 1.7
  Top Layer w0.5: L1.2@-27.299,-40.7 -25.6,-40.7
nRST: IC1.14 J1.9 | length 36.5
  Top Layer w0.254: IC1.14@-31.838,-25 -31.815,-24.977 -30.877,-24.977 -30.2,-24.3 -30.2,-22.7 -29,-21.5 -21.5,-21.5 -19.72,-23.28 -18.82,-23.28 v2(-18.8,-23.3)
  Bottom Layer w0.254: v2(-18.8,-23.3) -18.766,-23.266 -14.566,-23.266 -9.7,-18.4 -9.7,-17.3 -8.7,-16.3 J1.9@-2,-16.3
OSC_IN: C1.1 IC1.12 Y1.1 | length 7.1
  Top Layer w0.254: -34.2,-24 IC1.12@-31.838,-24
  Top Layer w0.5: Y1.1@-38.6,-24.4 -38.425,-24.575 -37.225,-24.575 C1.1@-37.1,-24.7 -34.8,-24.7 -34.2,-24.1
OSC_IN_GPS: "\".4" C64.2 Y2.1 | length 5.9
  Top Layer w0.254: -8.85,-35.05 -7.65,-35.05 -7.3,-35.4 -6.4,-35.4 -6.2,-35.2 Y2.1@-6.2,-34.7
  Top Layer w0.5: Y2.1@-6.2,-34.7 -5.425,-34.7 -5.1,-35.025 -4.075,-35.025 C64.2@-3.9,-35.2
OSC_OUT: C2.1 IC1.13 Y1.3 | length 12.6
  Top Layer w0.254: Y1.3@-40.6,-26.2 Y1.3@-40.499,-26.301 ; -33.2,-24.5 IC1.13@-32,-24.5
  Top Layer w0.5: C2.1@-42.4,-25.9 -42.4,-25.925 -42.3,-26.025 -41.099,-26.025 Y1.3@-40.949,-26.175 -40.9,-26.224 -40.9,-26.8 -40.5,-27.2 -36.2,-27.2 -33.5,-24.5 -33.2,-24.5
OSC_OUT_GPS: "\".6" C63.2 Y2.3 | length 4.7
  Top Layer w0.254: -8.85,-34.05 Y2.3@-6.95,-34.05
  Top Layer w0.5: Y2.3@-6.9,-33.9 -6.9,-32.8 -6.4,-32.3 C63.2@-6.4,-31.3
"OverCurrent M1": IC1.23 J10.1 | length 24.5
  Top Layer w0.254: J10.1@-51.6,-36.675 -45.075,-36.675 -43.2,-34.8 -35.6,-34.8 -34.7,-33.9 -34.7,-30.9 -33.3,-29.5 IC1.23@-31.838,-29.5
"OverCurrent M2": IC1.25 J11.1 | length 27.1
  Top Layer w0.254: J11.1@-51.7,-43.6 -51.681,-43.619 -50.519,-43.619 -42.6,-35.7 -35,-35.7 -33.5,-34.2 -33.5,-31.1 -32.9,-30.5 IC1.25@-31.838,-30.5
"OverCurrent M3": IC1.58 J8.1 | length 32
  Top Layer w0.254: IC1.58@-16.362,-27 -15.2,-27 -13.7,-25.5 -13.7,-24.4 -12.8,-23.5 v1(-12.7,-23.5)
  Bottom Layer w0.254: v1(-12.7,-23.5) -13.7,-24.5 -13.7,-31.7 -12.2,-33.2 -10,-33.2 -7.699,-35.501 -7.699,-37.201 -2.423,-42.477 -1.798,-42.477 J8.1@-1.6,-42.675
"OverCurrent M4": IC1.57 J9.1 | length 27.1
  Top Layer w0.254: IC1.57@-16.362,-27.5 -15,-27.5 -10.685,-23.185 -10.685,-22.115 v1(-10.7,-22.1)
  Bottom Layer w0.254: v1(-10.7,-22.1) -7.1,-22.1 -3.2,-26 -3.2,-33.575 -1.9,-34.875 J9.1@-1.9,-34.9
"RX1280 SCK": "\".18" IC1.52 | length 9.1
  Top Layer w0.254: IC1.52@-16.362,-30 -15.2,-30 -14.9,-30.3 -14.9,-35.1 -13.45,-36.55 -12.75,-36.55
"SCK BMI": IC1.29 U1.13 | length 9.1
  Top Layer w0.254: v1(-29.9,-25.3) -28.6,-26.6 v3(-28.6,-28.4) IC1.29@-28.6,-32.2
  Bottom Layer w0.254: v1(-29.9,-25.3) -29.779,-25.3 -29.579,-25.1 U1.13@-28.313,-25.1
"SCK BMP": IC1.1 IC2.2 | length 13.9
  Top Layer w0.254: v2(-40,-16.3) -40,-14.3 -39.702,-14.002 -39.402,-14.002 IC2.2@-39.4,-14 ; v5(-32.5,-16.3) -32.7,-16.3 -32.7,-16.335 -33.1,-16.735 -33.1,-18.275 -32.898,-18.477 -31.923,-18.477 IC1.1@-31.9,-18.5
  Bottom Layer w0.254: v2(-40,-16.3) v5(-32.5,-16.3)
"SD CLK": IC1.80 J5.5 | length 26.3
  Top Layer w0.254: v2@-22.8,-14.5 -22.773,-14.527 v2(-22.759,-14.527) -21.073,-14.527 -20.5,-15.1 -20.5,-15.5 -20.123,-15.877 -20.123,-16.739 IC1.80@-20.1,-16.762
  Bottom Layer w0.254: J5.5@-22.9,-4.6 -22.868,-4.632 -22.868,-5.532 -21.95,-6.45 -17.511,-6.45 -15.411,-8.549 -15.411,-12.711 -16.606,-13.906 -21.963,-13.906 -22.584,-14.527 v2(-22.759,-14.527)
"SD CMD": IC1.83 J5.3 R9.1 | length 28.9
  Top Layer w0.254: IC1.83@-21.6,-16.762 -21.577,-16.739 -21.577,-15.752 -21.3,-15.475 v2(-21.3,-15.3)
  Bottom Layer w0.254: v2(-21.3,-15.3) -21.3,-18.023 R9.1@-21.5,-18.223 -21.879,-17.844 -21.879,-17.621 -22.7,-16.8 -22.7,-15.6 -21.361,-14.261 -16.261,-14.261 -14.9,-12.9 -14.9,-8.558 -17.363,-6.095 -20.105,-6.095 -20.668,-5.532 -20.668,-4.632 J5.3@-20.7,-4.6
"SD D0": IC1.65 J5.7 R13.2 | length 42.1
  Top Layer w0.254: IC1.65@-16.1,-23.5 -15.3,-23.5 -14.685,-22.885 -14.685,-22.385 v1(-14.6,-22.3)
  Bottom Layer w0.254: J5.7@-25.1,-4.7 -25.068,-4.732 -25.068,-5.532 -23.794,-6.806 -17.658,-6.806 -17.279,-7.185 -17.279,-13.125 -17.704,-13.55 -22.95,-13.55 -23.6,-14.2 R13.2@-23.6,-18.223 -22.777,-18.223 -22.3,-18.7 -22.3,-20.535 -21.935,-20.9 -15.2,-20.9 -15,-20.7 -14.2,-20.7 -13.8,-21.1 -13.8,-21.8 -14.2,-22.2 -14.379,-22.2 -14.394,-22.215 -14.485,-22.215 v1@-14.5,-22.2
"SD D1": IC1.66 J5.8 R12.1 | length 43.7
  Top Layer w0.254: IC1.66@-16.362,-23 -16.339,-22.977 -15.577,-22.977 -15.3,-22.7 -15.3,-21.8 -14.985,-21.485 -14.685,-21.485 v1(-14.6,-21.4)
  Bottom Layer w0.254: J5.8@-26.2,-4.6 -26.168,-4.632 -26.168,-5.532 -24.539,-7.161 -17.805,-7.161 -17.671,-7.295 -17.671,-13.005 -17.817,-13.15 -23.053,-13.15 -24.4,-14.497 -24.4,-16.013 -25.7,-17.313 -25.7,-18.247 -25.321,-18.626 -24.774,-18.626 -24.3,-19.1 -23,-19.1 -22.7,-19.4 -22.7,-20.8 -22.104,-21.396 -14.604,-21.396 v1(-14.6,-21.4)
"SD D2": IC1.78 J5.1 R11.1 | length 22.3
  Top Layer w0.254: IC1.78@-19.1,-16.762 -19.1,-15.7 -18.844,-15.444 -18.624,-15.444 v2(-18.5,-15.321)
  Bottom Layer w0.254: v2(-18.5,-15.321) -18.5,-17 R11.1@-17.3,-18.2 ; J5.1@-18.4,-4.7 -17.6,-4.7 -14.1,-8.2 -14.1,-14 -17.3,-17.2 R11.1@-17.3,-18.2 ; R11.1@-17.3,-18.223 R11.1@-17.3,-18.2
"SD D3": IC1.79 J5.2 R10.1 | length 22.9
  Top Layer w0.254: v2(-19.7,-15) -19.623,-15.077 -19.623,-16.677 IC1.79@-19.6,-16.7
  Bottom Layer w0.254: v2(-19.7,-15) -19.576,-15 -19.525,-15 -19.142,-14.617 -15.917,-14.617 -14.5,-13.2 -14.5,-8.4 -17.2,-5.7 -19.4,-5.7 -19.568,-5.532 -19.568,-4.632 J5.2@-19.6,-4.6 ; v2@-19.613,-15.087 -19.576,-15.124 -19.576,-18.047 R10.1@-19.4,-18.223
"SD SWA": IC1.89 J5.9 | length 5.3
  Top Layer w0.254: v2(-25.4,-15) -25.225,-15 -24.58,-15.646 -24.58,-16.741 IC1.89@-24.6,-16.762
  Bottom Layer w0.254: J5.9@-27.165,-16.425 -25.657,-16.425 -25.4,-16.168 v2(-25.4,-15)
"ST Link RX": IC1.98 J1.7 | length 30.3
  Top Layer w0.254: v1(-29.3,-15) -29.3,-15.121 -29.1,-15.32 IC1.98@-29.1,-16.762
  PWR w0.254: v1(-29.3,-15) -26.493,-15 -25.293,-13.8 v2(-8.1,-13.8)
  Bottom Layer w0.254: v2(-8.1,-13.8) -5.4,-13.8 -3.9,-12.3 J1.7@-2,-12.3
"ST Link SWCLK": IC1.76 J1.4 | length 17.4
  Top Layer w0.254: IC1.76@-18.1,-16.762 -18.077,-16.739 -18.077,-15.977 -17.624,-15.524 -17.024,-15.524 v2(-16.9,-15.4) ; v2@-8.6,-15.5 -4.6,-15.5 -3.8,-16.3 J1.4@-2,-16.3
  PWR w0.254: v2(-16.9,-15.4) -16.85,-15.45 -8.75,-15.45 v2(-8.7,-15.5)
"ST Link SWDIO": IC1.72 J1.3 | length 19.9
  Top Layer w0.254: IC1.72@-16.362,-20 -14.8,-20 -14.121,-20.679 -10.679,-20.679 -10,-20 -10,-15.6 -9,-14.6 -2.3,-14.6 J1.3@-2,-14.3
"ST Link TX": IC1.97 J1.8 | length 36.1
  Top Layer w0.254: v1(-29.6,-13) -29.569,-13.031 -29.569,-13.877 -28.696,-14.75 -28.6,-14.846 IC1.97@-28.6,-16.7
  PWR w0.254: v1(-29.6,-13) -28.9,-12.3 -28.1,-12.3 -27.05,-13.35 -17.425,-13.35 -16.775,-12.7 v2(-8.1,-12.7)
  Bottom Layer w0.254: v2(-8.1,-12.7) -8.224,-12.824 -8.824,-12.824 -9,-13 -9,-14.1 -8.5,-14.6 -2.3,-14.6 J1.8@-2,-14.3
"SX1280 BUSSY": "\".7" IC1.56 | length 15.7
  Top Layer w0.254: IC1.56@-16.362,-28 -14.4,-28 v1(-12.4,-26) ; -9.55,-33.35 -9.55,-32.45 ; v1@-8.1,-31.1 v1(-8,-31)
  Top Layer w0.5: -9.35,-32.35 v1@-8.1,-31.1
  Bottom Layer w0.254: v1@-12.3,-26 -10.1,-26 -8,-28.1 v1(-8,-31)
"SX1280 nReset": "\".3" IC1.55 | length 19.9
  Top Layer w0.254: IC1.55@-16.362,-28.5 -13.9,-28.5 v1(-12.4,-27) ; -8.85,-35.55 -7.85,-35.55 -7.406,-35.994 -6.528,-35.994 -6.021,-36.5 v1(-6,-36.5)
  Bottom Layer w0.254: v1@-12.4,-27.1 -12.3,-27.1 -11.1,-28.3 -11.1,-30.9 -6.013,-35.987 -6.013,-36.487 v1(-6,-36.5)
TO_DCC_FB: "\".2" "\".12" C65.2 | length 12.7
  Top Layer w0.254: v1@-12.1,-32.4 -12.073,-32.427 -12.073,-33.327 -12.05,-33.35 ; -8.85,-36.05 -8.05,-36.05 -7.385,-36.715 -7.085,-36.715 v1(-7,-36.8) ; v1@-7,-36.721 -7,-36.921 -6.321,-37.6 C65.2@-5.625,-37.6
  Bottom Layer w0.254: v1(-12.1,-32.3) -10.3,-32.3 -7,-35.6 v1(-7,-36.8)
VCC: C37.1 C38.2 D1.1 IC3.3 R4.2 | length 13.1
  Top Layer w0.5: R4.2@-38.125,-38.3 -38.075,-38.35 -38.075,-39.65 C37.1@-38.025,-39.7 -38.05,-39.725 C38.2@-38.05,-41.475 ; C38.2@-38.075,-41.5 C38.2@-38.05,-41.475 ; -34.1,-44 -35.125,-42.975 IC3.3@-35.125,-41.45 -35.15,-41.475 C38.2@-38.05,-41.475
  Top Layer w1: -34.1,-44 -34.1,-44.055 -31.895,-46.26 D1.1@-31.895,-47
pads on no net: "\".8" "\".9" "\".10" "\".14" IC1.8 IC1.9 IC1.15 IC1.16 IC1.17 IC1.18 IC1.34 IC1.35 IC1.39 IC1.40 IC1.41 IC1.42 IC1.43 IC1.44 IC1.45 IC1.46 IC1.47 IC1.61 IC1.62 IC1.63 IC1.64 IC1.67 IC1.68 IC1.69 IC1.70 IC1.71 IC1.77 IC1.81 IC1.82 IC1.84 IC1.85 IC1.86 IC1.87 IC1.88 IC1.90 IC1.91 IC1.92 IC4.4 IC6.11 IC6.12 IC6.17 IC6.18 IC6.24 IC6.25 IC6.31 IC6.34 IC6.36 IC6.39 IC6.45 IC6.46 J1.1 J1.2 J1.5 S1.1 SW1.2 SW1.4 U1.2 U1.3 U1.10 U1.11

## Polygon pours and split planes (outlines as drawn)
+3.3 on PWR "3V3_Plane" (solid, remove dead copper, pour order 10): -3.735,-4.05 -3.735,-47 -49.1,-47 -49.1,-4
BAT+ on PWR "BAT_Plane" (solid, remove dead copper, pour order 8): -53.1,-4 -0.1,-4 -0.1,0 -53.1,0
BAT+ on PWR "BAT_Plane" (solid, remove dead copper, pour order 7): -53.1,0 -53.1,-51 -49.1,-51 -49.1,0
BAT+ on PWR "3V3_Plane" (solid, remove dead copper, pour order 15): -3.2,-43.718 -6.8,-47.1 -3.2,-47.1
BAT+ on PWR "3V3_Plane" (solid, remove dead copper, pour order 14): 0,-47.2 -3.6,-47.2 -3.6,-19.8 -3.5,-19.7 -0.1,-19.7
BAT+ on PWR "BAT_Plane" (solid, remove dead copper, pour order 6): -0.1,-47 -53.1,-47 -53.1,-51 -0.1,-51
BAT+ on PWR "BAT_Plane" (solid, remove dead copper, pour order 9): -0.1,-51 -0.1,2 -4.1,2 -4.1,-51
BAT- on GND "GND_Plane" (solid, remove dead copper, pour order 13): 0,-0.1 -52.9,-0.1 -53.2,-0.4 -53.2,-51.2 0,-51.2 0.1,-51.3
BAT- on Bottom Layer "3V3_Plane" (solid, remove dead copper, pour order 16): -38.8,-50.1 -16.9,-50.1 -16.9,-28.1 -38.8,-28.1

## Keep-outs
Top Layer:
  lines w0.254: -53.1,-51.1 -53,-51
Keep-Out Layer:
  lines w0.254: -53.1,-51.1 0,-51.1 0,-0.1 -52.9,-0.1 ; -53,-51 -53,0

## Other copper
Multi-Layer:
  pour cut-out: -0.2,-8.95 -4.4,-8.95 -4.4,-19.65 -0.2,-19.65

## Silkscreen, mask and mechanical layers (free items; w line width, h text height)
Top Overlay:
  text "+" at -6.3,-2.354 h1.52 r270
  text "-" at -46.492,-3.421 h1.52 r90
  text "-" at -6.508,-6.454 h1.52 r270
  text "+" at -46.525,-7.546 h1.52 r90
  text "-" at -45.629,-44.667 h1.52 r180
  text "+" at -41.579,-44.675 h1.52 r180
  text "+" at -7.596,-45.675 h1.52
  text "-" at -3.546,-45.683 h1.52
Bottom Overlay:
  text "+" at -6.5,-2.354 h1.52 r270
  text "-" at -46.517,-3.496 h1.52 r90
  text "-" at -6.508,-6.454 h1.52 r270
  text "+" at -46.525,-7.571 h1.52 r90
  text "GND" at -2.754,-31.046 h0.6
  text "GND" at -48.654,-32.246 h0.6
  text "ESC1" at -6.154,-32.846 h0.7
  text "Dshot" at -2.754,-33.346 h0.6
  text "Dshot" at -47.654,-34.546 h0.6
  text "OC" at -2.754,-35.446 h0.6
  text "ESC3" at -43.854,-35.546 h0.8
  text "OC" at -49.054,-36.846 h0.6
  text "GND" at -3.054,-38.546 h0.6
  text "ESC2" at -5.454,-39.246 h0.8
  text "GND" at -48.854,-39.546 h0.6
  text "ESC2" at -45.254,-39.846 h0.8
  text "Dshot" at -2.954,-40.746 h0.6
  text "Dshot" at -47.854,-41.846 h0.6
  text "OC" at -2.954,-42.946 h0.6
  text "OC" at -49.254,-44.146 h0.6
  text "-" at -45.604,-44.667 h1.52 r180
  text "+" at -41.554,-44.675 h1.52 r180
  text "+" at -7.596,-45.65 h1.52
  text "-" at -3.546,-45.658 h1.52
Mechanical 1:
  lines w0.254: -53.1,-51.1 -53.1,0 0,0 0,-51.1 -53.1,-51.1

## Text inside footprints (layer, text, board x,y; h text height)
J1: Mechanical 1 "Milling" at 2.137,-12.154 h1.52 r270